# Altium PCB Double_side.PcbDoc
Units mm, origin at the board's own origin, x right, y up, seen from the top; angles counter-clockwise.
Board outline 123 x 94 mm, 2 copper layers (Top Layer, Bottom Layer); 63 components, 69 nets, 301 pads, 63 vias.
Unrouted connection lines stored in the file: 16.
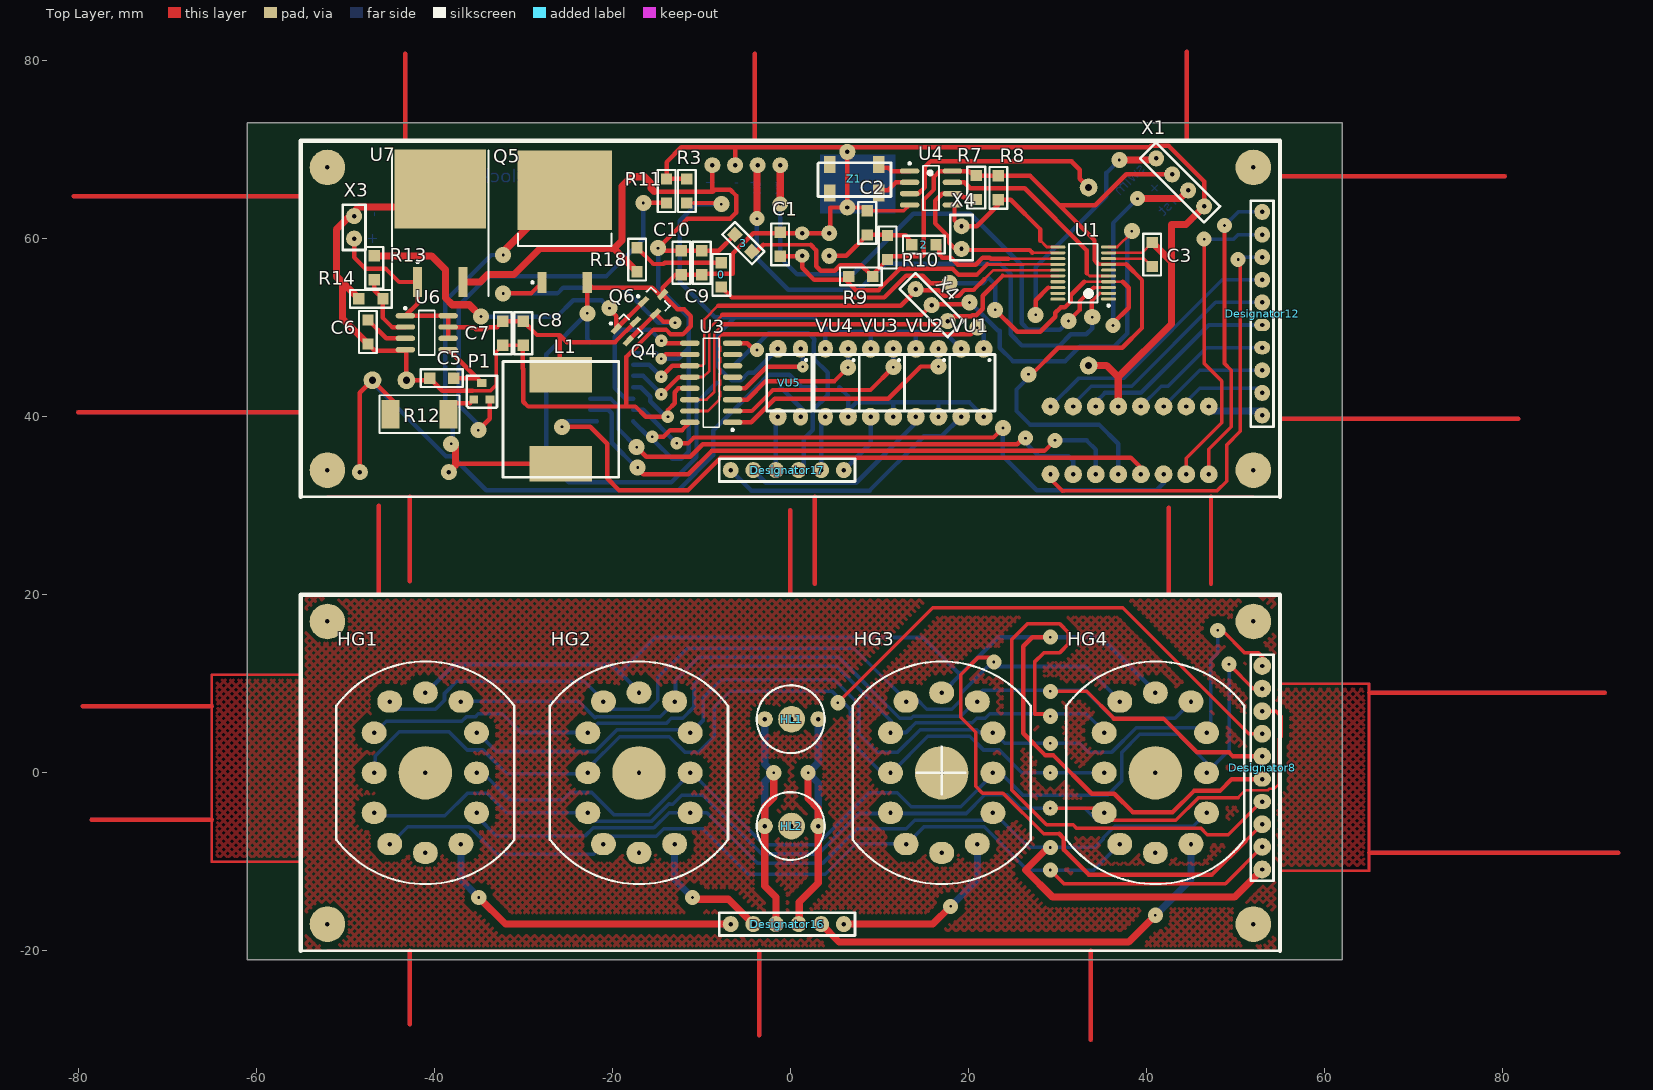
[diagram p0: Top Layer view]
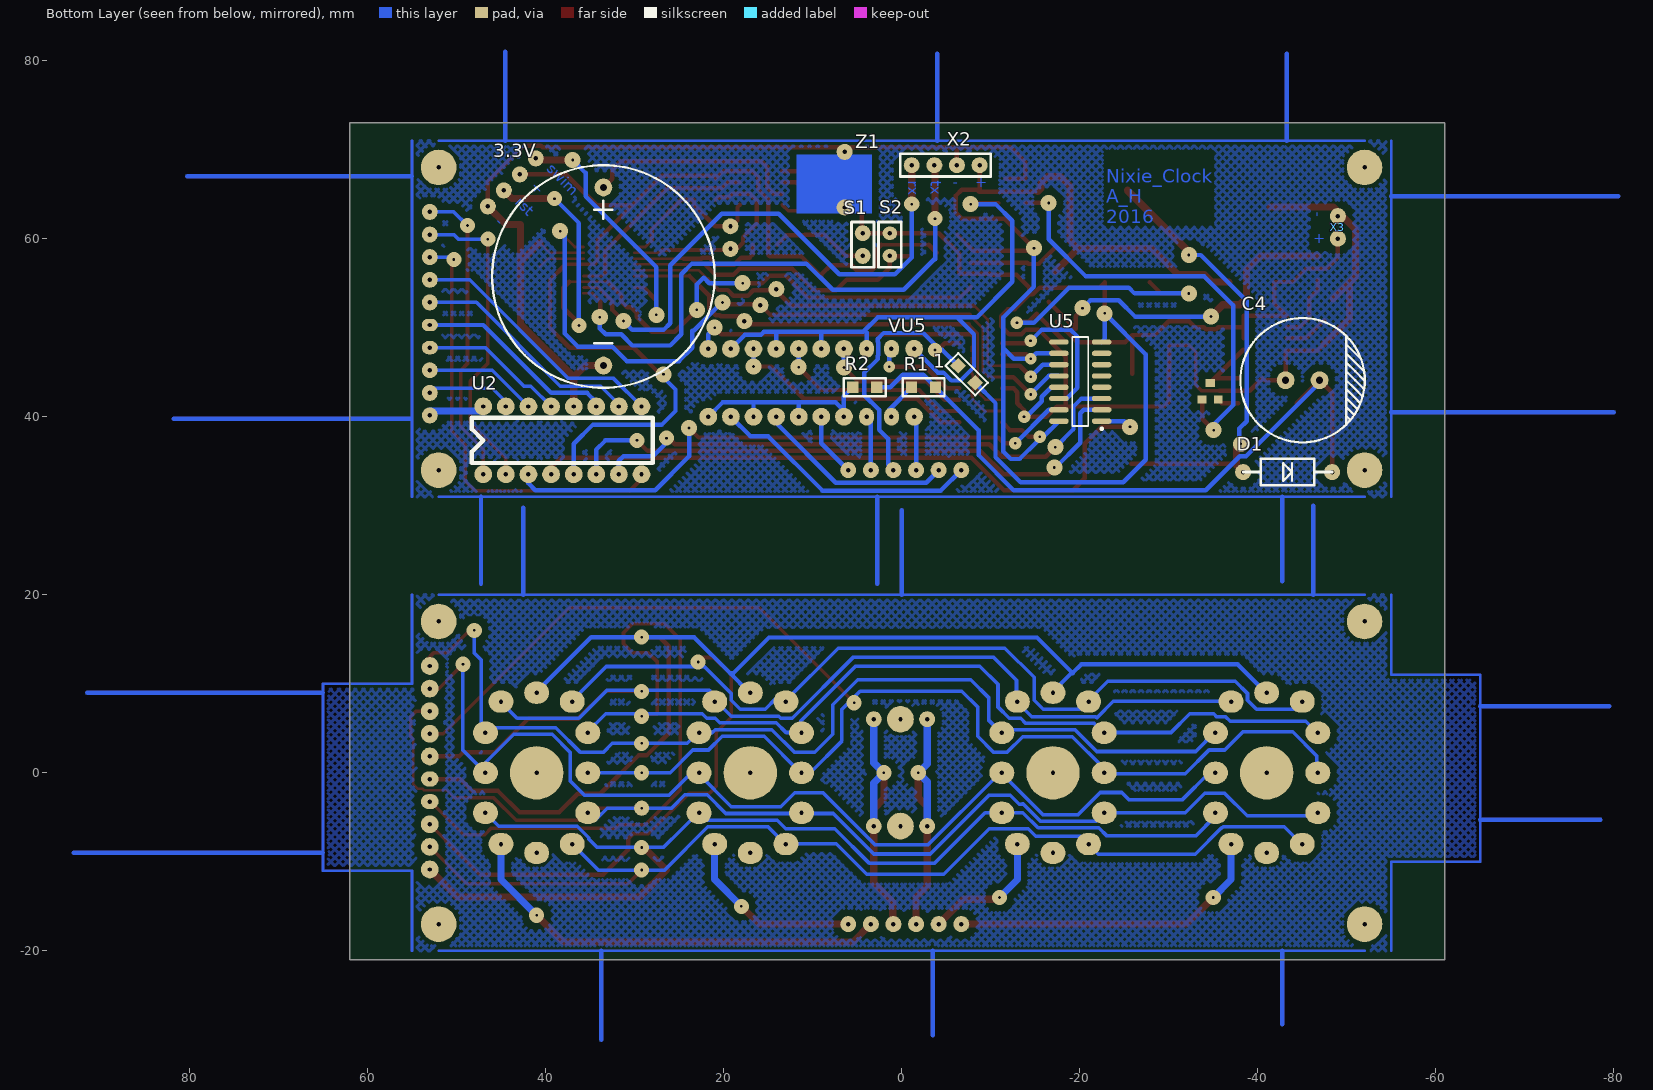
[diagram p1: Bottom Layer view, seen from below]
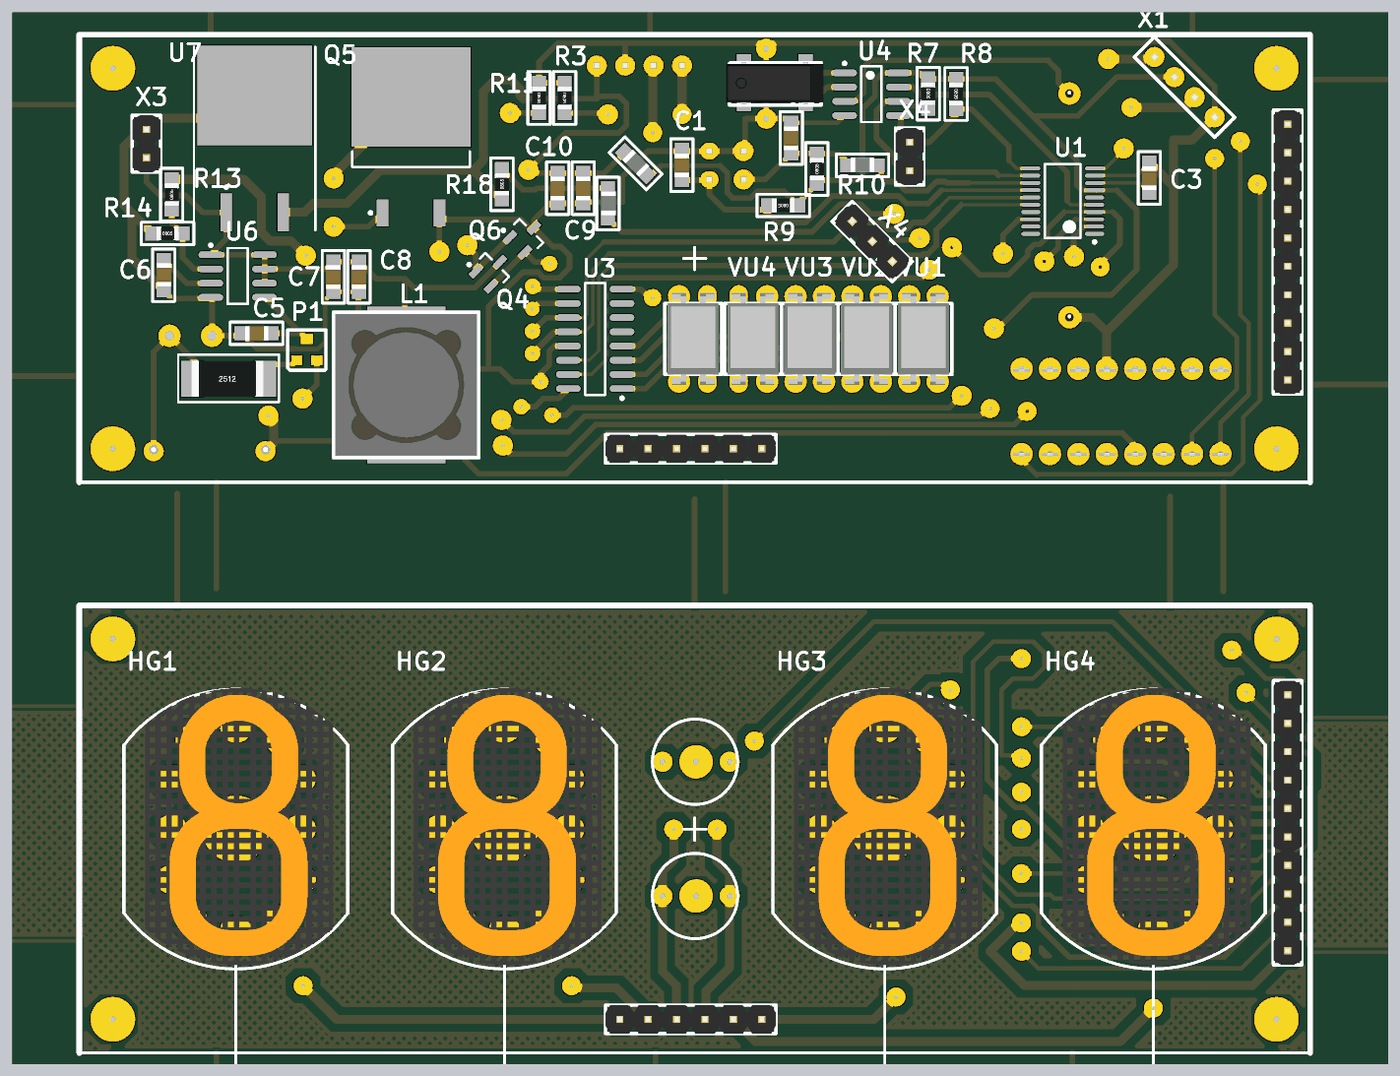
[diagram p2: 3D render of the assembled board from above, using the file's embedded part models]
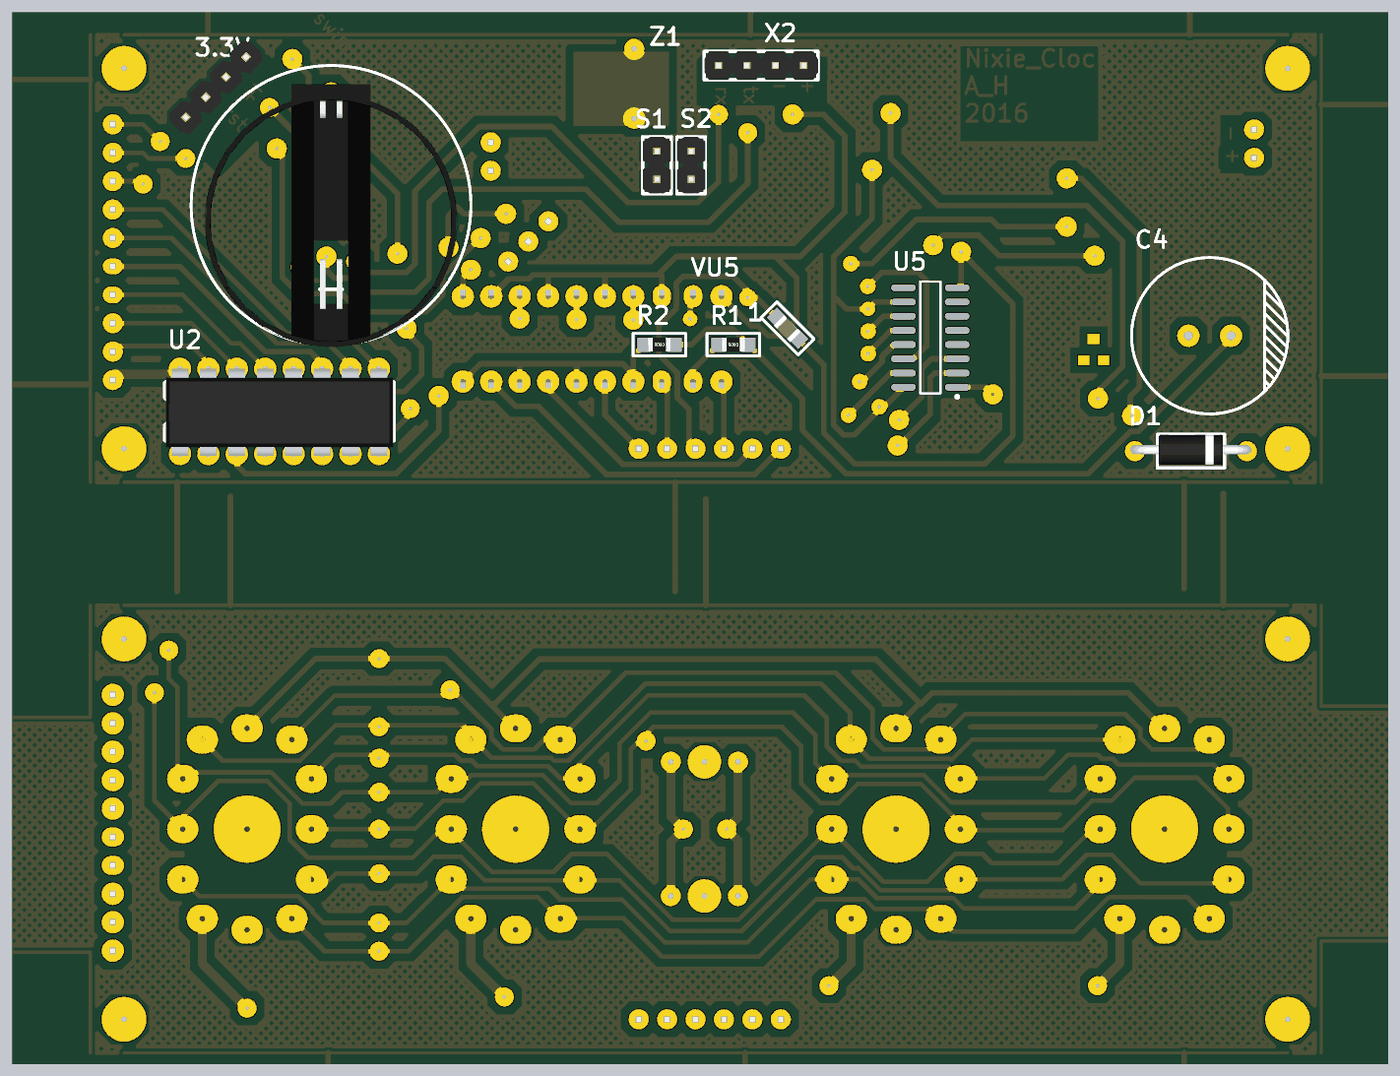
[diagram p3: 3D render of the assembled board from below, using the file's embedded part models]

## Layer stack, top to bottom
Top Solder: solder mask 0.0102, Solder Resist, Dk 3.5
Top Layer: signal copper 0.0356
Dielectric 1: dielectric 0.32, FR-4, Dk 4.8
Bottom Layer: signal copper 0.0356
Bottom Solder: solder mask 0.0102, Solder Resist, Dk 3.5

## Board outline
-61,-21 -61,73 62,73 62,-21

## Design rules (kind name [scope] priority, off if disabled: settings)
Clearance Poly_clearence [InPolygon vs InNetClass('All Nets')] p1: gap=0.7
Clearance Clearance_1 [All] p2: gap=0.254
Height [All] p1: minheight=0 maxheight=50 prefheight=12.7
PolygonConnect [All] p1: connectstyle=Relief reliefconductorwidth=0.254 reliefentries=4 polygonreliefangle="90 Angle" airgapwidth=0.254
RoutingVias [All] p1: holewidth=0.711 width=1.27 viastyle="Through Hole" minholewidth=0.711 minwidth=1.27 maxholewidth=0.711 maxwidth=1.27
SolderMaskExpansion [All] p1: expansion=0.102
Width [All] p1: maxlimit=5 minlimit=0.254 preferedwidth=0.5
29 further rules are at their usual default settings.

## Classes and differential pairs
net class Q[1..8]: Q1 Q2 Q3 Q4 Q5 Q6 Q7 Q8
component class Scheme: L1 X1 X2 X3 X4

## Components (designator, comment, footprint, x,y, rotation, side; value= is the part's Value field where it differs from the comment)
0 "Comment" R0805_pofigistor -7.747,57.277 r270 top
1 "Comment" R0805_pofigistor -8.255,43.815 r45 bottom
2 "Comment" R0805_pofigistor 13.65,59.325 r0 top
3 "Comment" R0805_pofigistor -6.227,60.456 r315 top
3.3V "CR2032_Holder_BH-642" BH-642(CR2032) 33.5,45.75 r180 bottom
C1 "1u" C0805 -1.143,60.706 r270 top
C2 "1u" C0805 8.636,63.119 r270 top
C3 "1u" C0805 40.64,59.563 r270 top
C4 "Cond_4700uF" Cond_3*1.27 -46.94,44.1 r0 bottom
C5 "100" C0805 -40.513,44.323 r0 top
C6 "470" C0805 -47.448,48.164 r90 top
C7 "Condensator_0805" C0805 -32.289,50.723 r270 top
C8 "Condensator_0805" C0805 -30.003,50.723 r270 top
C9 "Condensator_0805" C0805 -9.956,58.643 r270 top
C10 "Condensator_0805" C0805 -12.242,58.643 r270 top
D1 "HER106" DO-41 -38.354,33.782 r180 bottom
Designator8 "Comment" "Pins 10x2.54"#1 53,12 r270 top
Designator12 "Comment" "Pins 10x2.54"#2 53,63 r270 top
Designator16 "Comment" "Pins 6x2.54" 6,-17 r180 top
Designator17 "Comment" "Pins 6x2.54" 6,34 r180 top
HG1 "ИН-12" ИН-12 -41,0 r0 top
HG2 "ИН-12" ИН-12 -17,0 r0 top
HG3 "ИН-12" ИН-12 17,0 r0 top
HG4 "ИН-12" ИН-12 41,0 r0 top
HL1 "ИНС-1" INS-1 -1.87,6.022 r0 top
HL2 "ИНС-1" INS-1 -1.87,-5.978 r0 top
L1 "220uH" SRR1208 -25.781,44.704 r270 top
P1 "PVZ3A222 2.2k" PVZ3A222 -35.56,41.91 r0 top
Q4 "BC817-16" SOT23_N -18.138,49.936 r45 top
Q5 "IRF840AS" D2PAK_N -25.35,61.88 r90 top
Q6 "BC807-16" SOT23_N -15.085,52.99 r45 top
R1 "1020" R0805 -3.81,43.307 r0 bottom
R2 "Resistor" R0805 2.794,43.307 r0 bottom
R3 "470" R0805 -11.622,66.706 r270 top
R7 "10k" R0805 20.878,67.087 r270 top
R8 "10k" R0805 23.368,67.056 r270 top
R9 "10k" R0805 9.271,55.753 r180 top
R10 "10k" R0805 10.922,57.658 r90 top
R11 "3k" R0805 -13.908,66.706 r270 top
R12 "560k" R2512 -41.656,40.259 r0 top
R13 "330" R0805 -46.736,55.372 r90 top
R14 "330" R0805 -48.464,53.244 r0 top
R18 "10k" R0805 -17.222,56.292 r90 top
S1 "Tact_switch" "Pins 2x2.54"#1 4.368,60.61 r270 bottom
S2 "Tact_switch" "Pins 2x2.54"#2 1.32,60.61 r270 bottom
U1 "STM8S003" STM8S003_TSOP20 32.893,56.134 r180 top
U2 "К155ИД1" К155ИД1 47,33.528 r90 bottom
U3 "SN74HC595D" D016_N -8.89,43.815 r180 top
U4 "DS1307Z+T&R" S8+2_N 15.798,65.69 r0 top
U5 "SN74HC595D" D016_N -20.066,43.942 r0 bottom
U6 "MC34063AD" 751-05_N -40.844,49.434 r0 top
U7 "L7805ABD2T" TO-263 -39.32,60.356 r0 top
VU1 "Optopara_TLP627" Optopara_TLP627#1 21.72,47.62 r270 top
VU2 "Optopara_TLP627" Optopara_TLP627#1 16.64,47.62 r270 top
VU3 "Optopara_TLP627" Optopara_TLP627#1 11.56,47.62 r270 top
VU4 "Optopara_TLP627" Optopara_TLP627#2 6.48,47.62 r270 top
VU5 "Optopara_TLP627" Optopara_TLP627#3 1.143,47.625 r270 top
X1 "Pins 4x2.54" "Pins 4x2.54" 46.482,63.627 r135 top
X2 "Pins 4x2.54" "Pins 4x2.54" -8.75,68.25 r0 bottom
X3 "Pins 2x2.54" "Pins 2x2.54"#1 -49,60 r90 bottom
X4 "I2C debug" "Pins 2x2.54"#1 19.225,58.85 r90 top
X4 "SPI debug" "Pins 3x2.54" 14.075,54.325 r315 top
Z1 "Crystal Oscillator" "Geyer KX - 327S 32.768kHz" 9.906,68.326 r180 top

## Footprints (in the part's own frame and the unit in brackets; to place one, negate y for a bottom-side part, rotate by r counter-clockwise, add the part's x,y. Pads: shape width x height; smd on the part's side, far side on the other; paste and mask are expansions set on the pad)
751-05_N [mm] "SOIC, 8-Leads, Body 4.9x3.9mm, Pitch 1.27mm, IPC Medium Density"
  oval 2.2x0.6 smd: 1(-2.4,1.905) 2(-2.4,0.635) 3(-2.4,-0.635) 4(-2.4,-1.905) 5(2.4,-1.905) 6(2.4,-0.635) 7(2.4,0.635) 8(2.4,1.905)
  silkscreen extent -2.52,-2.5 0.9,2.88, body extent -1.95,-2.45 1.95,2.45, height 1.75
BH-642(CR2032) [mm]
  round 2 hole 0.762: 1(0,0) 2(0,20)
  silkscreen extent -12.5,-2.5 12.5,22.5, body extent -11.3,-2.67 11.3,20.83, height 8.2
C0805 [mm]
  rect 1.27x1.27 smd: 1(0,0) 2(2.7,0)
  silkscreen extent -1,-1 3.7,1, body extent 0.32,-0.66 2.42,0.64, height 0.51
Cond_3*1.27 [mm]
  round 2 hole 0.8: 1(0,0) 2(3.81,0)
  silkscreen extent -5.08,-6.98 8.89,6.98
D2PAK_N [mm] "D2-PAK, 4-Leads, Body 8.8x10.4mm, Pitch 2.54mm, Lead Span 15.1mm, IPC Medium Density"
  rect 2.4x1.05 smd: 1(-6.8,2.54) 3(-6.8,-2.54)
  rect 8.9x10.65 smd: 2(3.55,0)
  silkscreen extent -6.92,-5.25 -1.3,5.25, body extent -2.7,-5.28 6.3,5.28, height 4.69
D016_N [mm] "SOIC, 16-Leads, Body 9.9x3.9mm, Pitch 1.27mm, IPC Medium Density"
  oval 2.2x0.6 smd: 1(-2.4,4.445) 2(-2.4,3.175) 3(-2.4,1.905) 4(-2.4,0.635) 5(-2.4,-0.635) 6(-2.4,-1.905) 7(-2.4,-3.175) 8(-2.4,-4.445) 9(2.4,-4.445) 10(2.4,-3.175) 11(2.4,-1.905) 12(2.4,-0.635) 13(2.4,0.635) 14(2.4,1.905) 15(2.4,3.175) 16(2.4,4.445)
  silkscreen extent -2.53,-5 0.9,5.42, body extent -1.95,-4.95 1.95,4.95, height 1.75
DO-41 [mm]
  round 1.8 hole 0.5: 1(0,0) 2(10,0)
  silkscreen extent 0,-1.5 10,1.5, body extent -0.43,-1.23 10.43,1.5, height 3.36
"Geyer KX - 327S 32.768kHz" [mm]
  rect 1.3x1.9 smd: 1(0,0) 2(0,3.2) 3(5.5,3.2) 4(5.5,0)
  silkscreen extent -1.4,-0.2 6.8,3.6, body extent -1.6,-0.25 7.1,3.55, height 2.51
INS-1 [mm]
  round 1.8 hole 0.5: 1(-1,0) 2(5,0)
  round 3 hole 0.5: 3(2,0)
  silkscreen extent -1.9,-3.81 5.71,3.81, body extent -1.59,-3.5 5.41,3.5, height 28
Optopara_TLP627#1 [mm]
  round 2 hole 0.5: 1(0,0) 2(0,-2.54) 3(7.62,-2.54) 4(7.62,0)
  silkscreen extent 0.63,-3.81 6.98,1.27, body extent -0.59,-3.56 8.21,1.02, height 4.46
Optopara_TLP627#2 [mm]
  round 2 hole 0.5: 1(0,0) 4(7.62,0)
  oval 2x1.65 hole 0.5: 2(0,-2.54) 3(7.62,-2.54)
  silkscreen extent 0.63,-3.81 6.98,1.27, body extent -0.59,-3.56 8.21,1.02, height 4.46
Optopara_TLP627#3 [mm]
  oval 2x1.65 hole 0.5: 1(0,0) 4(7.62,0)
  round 2 hole 0.5: 2(0,-2.54) 3(7.62,-2.54)
  silkscreen extent 0.63,-3.81 6.98,1.27, body extent -0.59,-3.56 8.21,1.02, height 4.46
"Pins 2x2.54"#1 [mm]
  round 1.8 hole 0.5: 1(0,0) 2(2.54,0)
  silkscreen extent -1.27,-1.27 3.81,1.27, body extent -1.27,-1.27 3.81,1.27, height 8.81
"Pins 2x2.54"#2 [mm]
  oval 1.5x1.65 hole 0.5: 1(0,0) 2(2.54,0)
  silkscreen extent -1.27,-1.27 3.81,1.27, body extent -1.27,-1.27 3.81,1.27, height 8.81
"Pins 3x2.54" [mm]
  round 1.8 hole 0.5: 1(0,0) 2(2.54,0) 3(5.08,0)
  silkscreen extent -1.27,-1.27 6.35,1.27, body extent -1.27,-1.27 6.35,1.27, height 8.81
"Pins 4x2.54" [mm]
  round 1.8 hole 0.5: 1(0,0) 2(2.54,0) 3(5.08,0) 4(7.62,0)
  silkscreen extent -1.27,-1.27 8.89,1.27, body extent -1.27,-1.27 8.89,1.27, height 8.81
"Pins 6x2.54" [mm]
  round 1.8 hole 0.5: 1(0,0) 2(2.54,0) 3(5.08,0) 4(7.62,0) 5(10.16,0) 6(12.7,0)
  silkscreen extent -1.27,-1.27 13.97,1.27, body extent -1.27,-1.27 13.97,1.27, height 8.81
"Pins 10x2.54"#1 [mm]
  round 2 hole 0.5: 1(0,0) 2(2.54,0) 3(5.08,0) 4(7.62,0) 5(10.16,0) 8(17.78,0) 9(20.32,0) 10(22.86,0)
  oval 1.7x2 hole 0.5: 6(12.7,0) 7(15.24,0)
  silkscreen extent -1.27,-1.27 24.13,1.27, body extent -1.42,-1.6 24.28,1.6, height 8.81
"Pins 10x2.54"#2 [mm]
  round 1.8 hole 0.5: 1(0,0) 2(2.54,0) 3(5.08,0) 4(7.62,0) 5(10.16,0) 8(17.78,0) 9(20.32,0) 10(22.86,0)
  oval 1.4x1.8 hole 0.5: 6(12.7,0)
  oval 1.5x1.8 hole 0.5: 7(15.24,0)
  silkscreen extent -1.27,-1.27 24.13,1.27, body extent -1.42,-1.42 24.28,1.42, height 8.81
PVZ3A222 [mm]
  rect 1x0.9 all layers, no hole: 1(0,0) 3(1.8,0)
  rect 1.1x0.9 all layers, no hole: 2(0.9,1.9)
  silkscreen extent -0.8,-0.9 2.6,2.7
R0805 [mm]
  rect 1.27x1.27 smd: 1(0,0) 2(2.7,0)
  silkscreen extent -1,-1 3.7,1, body extent 0.35,-0.62 2.35,0.63, height 0.61
R0805_pofigistor [mm]
  rect 1.27x1.27 smd: 1(0,0) 2(2.7,0)
  silkscreen extent -1,-1 3.7,1, body extent 0.3,-0.61 2.4,0.69, height 0.51
R2512 [mm]
  rect 2x3.2 smd: 1(-3.25,0) 2(3.25,0)
  silkscreen extent -4.5,-2.1 4.5,2.15, body extent -3.3,-1.6 3.1,1.6
S8+2_N [mm] "SOIC, 8-Leads, Body 4.9x3.9mm, Pitch 1.27mm, IPC Medium Density"
  oval 2.2x0.6 smd: 1(-2.4,1.905) 2(-2.4,0.635) 3(-2.4,-0.635) 4(-2.4,-1.905) 5(2.4,-1.905) 6(2.4,-0.635) 7(2.4,0.635) 8(2.4,1.905)
  silkscreen extent -2.52,-2.5 0.9,2.88, body extent -2,-2.5 2,2.5, height 1.75
SOT23_N [mm] "SOT23, 3-Leads, Body 2.9x1.3mm, Pitch 0.95mm, Lead Span 2.3mm, IPC Medium Density"
  rect 1.3x0.6 smd: 1(-1.05,0.95) 2(-1.05,-0.95) 3(1.05,0)
  silkscreen extent -1.17,-1.5 0.7,1.92, body extent -0.7,-1.5 0.7,1.5, height 1.1
SRR1208 [mm]
  rect 4x7 smd: 1(0,0) 2(10,0)
  silkscreen extent -1.5,-6.5 11.5,6.5, body extent -1.35,-6.35 11.35,6.35, height 8.5
STM8S003_TSOP20 [mm]
  oval 1.7x0.35 smd: 1(-2.85,2.925) 2(-2.85,2.275) 3(-2.85,1.625) 4(-2.85,0.975) 5(-2.85,0.325) 6(-2.85,-0.325) 7(-2.85,-0.975) 8(-2.85,-1.625) 9(-2.85,-2.275) 10(-2.85,-2.925) 11(2.85,-2.925) 12(2.85,-2.275) 13(2.85,-1.625) 14(2.85,-0.975) 15(2.85,-0.325) 16(2.85,0.325) 17(2.85,0.975) 18(2.85,1.625) 19(2.85,2.275) 20(2.85,2.925)
  silkscreen extent -2.98,-3.3 1.6,3.77, body extent -2.25,-3.3 2.25,3.3, height 1.2
TO-263 [mm] "D2-PAK/TO-263-AB; 3 Leads (1 Cropped); Body 15.9 (inc. leads) x 10.4 mm (LxW max)"
  rect 1x3.4 smd: 1(-2.54,-5.225) 3(2.54,-5.225)
  rect 10.25x8.9 smd: 4(0,5.225)
  silkscreen extent -5.43,-6.83 5.43,9.57
ИН-12 [mm]
  round 6 hole 0.5: 0(0,0)
  oval 2.8x2.5 hole 0.5 unplated: 1(4,-8) 2(5.75,-4.5) 3(5.75,0) 4(5.75,4.5) 5(4,8) 6(0,9) 7(-4,8) 8(-5.75,4.5) 9(-5.75,0) 10(-5.75,-4.5) 11(-4,-8) 12(0,-9)
  silkscreen extent -10.01,-12.5 10.01,12.51, body extent -10,-13.5 10,13.5, height 25
К155ИД1 [mm]
  round 2 hole 0.5: 1(0,0) 2(0,-2.54) 3(0,-5.08) 4(0,-7.62) 5(0,-10.16) 6(0,-12.7) 7(0,-15.24) 8(0,-17.78) 9(7.62,-17.78) 10(7.62,-15.24) 11(7.62,-12.7) 12(7.62,-10.16) 13(7.62,-7.62) 14(7.62,-5.08) 15(7.62,-2.54) 16(7.62,0)
  silkscreen extent 1.27,-19.05 6.35,1.27, body extent -0.18,-19.05 7.62,1.27, height 5.01

## Part data
C1 C2 C3 C5 C6: library part Condensator_0805
D1: library part Diod
L1: library part Inductance
P1: library part Podstroechnik
Q4: "NPN General-purpose Transistor"
Q5: "HEXFET Power MOSFET"
Q6: "PNP General-purpose Transistor"
R1 R3 R7 R8 R9 R10 R11 R12 R13 R14 R18: library part Resistor
U3 U5: "8-Bit Shift Register with 3-State Output Registers"
U4: "64 x 8, Serial, I2C Real-Time Clock, 5.0V, 8-Pin SO, 0 to 70 degC, Pb-Free, Reel"
U6: "DC-to-DC Converter Control Circuit"
U7: "Precision 1A Regulator"
X4: library part "Pins 2x2.54"
X4: library part "Pins 3x2.54"

## Free pads (board coordinates)
  round 1.8 hole 0.5: 2(6.405,63.5) 3(6.405,69.75)
  round 4 hole 0.5: 4(-52,17) 5(-52,-17) 6(52,17) 7(52,-17) 8(-52,34) 9(52,68) 10(52,34) 11(-52,68)
  round 1.7 hole 0.3: 12(29.2,-3.975)

## Via types
v1: diameter 1.8, hole 0.3, Top Layer to Bottom Layer, 27 vias
v2: diameter 1.7, hole 0.3, Top Layer to Bottom Layer, 26 vias
v3: diameter 1.4, hole 0.3, Top Layer to Bottom Layer, 7 vias
v4: diameter 1.3, hole 0.3, Top Layer to Bottom Layer, 1 vias
v5: diameter 1.55, hole 0.3, Top Layer to Bottom Layer, 1 vias
v6: diameter 1.27, hole 0.3, Top Layer to Bottom Layer, 1 vias

## Nets (pads, with @x,y where several pads share a name; then routed paths per layer and width w, separated by ;. In a path a pad name is that pad's centre, name@x,y a point inside that pad or via, vN(x,y) a via of type N, cw(c..) or ccw(c..) an arc to the next point about the centre after c; other vN are vias at no path point)
GND: 1.1 1.2 3.3V.1 C1.1 C2.1 C3.1 C4.2 C5.1 C6.1 C7.2 C8.2 C9.2 C10.2 Designator16.3 Designator17.3 HL1.2 HL2.2 pad.2 pad.3 Q5.3 Q6.3 R3.1 R11.1 R14.1 S1.1 S2.1 U1.9 U2.12 U3.8 U3.13 U4.4 U5.8 U5.13 U6.4 U7.4 X1.1 X2.2 X3.2 | length 385.3
  Top Layer w0.3: U1.9 39.486,58.409 C3.1
  Top Layer w0.4: -35.687,42.926 -35.418,42.926 -35.398,42.906 -33.675,42.906 -33.02,43.561 -33.02,47.292 C7.2 C8.2 -30.003,46.941 ; C2.1 12.733,63.119 U4.4
  Top Layer w0.5: C6.1 -46.699,47.415 -43.13,47.415 C4.2 C5.1@-40.736,44.1 ; C5.1 -39.116,42.926 -35.687,42.926 ; C8.2@-30.048,47.422 -30.048,45.415 -30.012,45.379 -30.012,41.696 -29.464,41.148 -17.398,41.148 -16.25,40 v3(-13.75,40) -13.75,40.75 -13,41.5 -13,42.75 -12.57,43.18 U3.13 ; v1(-22.81,51.612) Q5.3 -22.213,54.483 -15.494,54.483 -14.743,53.732 Q6.3 ; -18.415,41.148 -18.415,46.736 -15.367,49.784 -13.97,49.784 -13.462,49.276 -12.065,49.276 -11.176,50.165 -11.176,51.308 -11.938,52.07 -12.68,52.07 Q6.3 ; R3.1 R11.1 -13.908,68.592 -12.249,70.251 -0.996,70.251 4.003,70.248 ; C9.2 C10.2 -12.904,55.943 -14.342,54.505 Q6.3 ; C9.2@-9.956,56.038 -6.46,56.038 -6.46,58.324 -4.174,60.61 S2.1 S1.1 4.5,60.478 4.5,60.61 4.5,63.5 pad.2 ; U3.8 -4.826,48.26 -4.066,47.5 v5(-3.75,47.5) ; X2.2 -6.21,70.211 ; 4.14,70.25 40.343,70.25 40.512,70.419 42.484,70.419 46.482,66.421 X1.1 ; pad.3 pad.2 ; C2.1@8.255,63.5 pad.2
  Top Layer w0.8: -50.292,55.072 -50.292,51.008 C6.1 ; R14.1 -51,55.78 -51,61.014 -48.474,63.54 U7.4@-41.36,63.54 ; Designator16.3 1,-16.92 1,-14.5 3.13,-12.37 HL2.2 3.13,-4.03 2,-2.9 v2(2,0) ; 3.3V.1 35.53,45.75 36.83,44.45 ; U2.12@36.83,41.275 36.83,44.45 ; C3.1 42.799,57.404 ; X1.1 44.45,61.595 42.799,61.595 42.799,57.404 ; 36.83,44.45 42.799,50.419 42.799,57.404
  Bottom Layer w0.5: U5.8 -22.81,48.731 v1(-22.81,51.612) -27.432,46.99 -27.432,35.179 -24.892,32.639 -13.361,32.639 -10.541,35.459 -10.541,41.529 1.1 ; U5.13 -16.807,43.307 -15.754,42.254 -15.754,42.184 -15.75,42.18 -15.75,41.75 -14,40 v3(-13.75,40) ; 1.2 -4.57,47.5 v5(-3.75,47.5) -3.75,48.066 -2.413,49.403 2.032,49.403 2.667,48.768 2.667,48.401 2.611,48.345 2.611,46.895 2.667,46.839 2.667,46.482 4.191,44.958 4.191,42.418 2.54,40.767 2.54,38.54 1.5,37.5 1.5,34.58 Designator17.3
  Bottom Layer w0.8: HL2.2 3.13,-1.13 v2(2,0) 3.13,1.13 HL1.2
Net3.3V_2: 3.3V.2 U4.3 | length 24.8
  Top Layer w0.5: U4.3 14.382,65.055 15.113,65.786 15.113,68.072 15.748,68.707 31.623,68.707 31.623,68.641 32.512,67.752 32.512,66.738 3.3V.2
NetC1_2: C1.2 R9.2 S2.2 U1.14 | length 35.3
  Top Layer w0.3: 22.098,57.105 26.205,57.105 26.217,57.117 30.035,57.117 U1.14
  Top Layer w0.5: C1.2 S2.2@1.257,58.006 ; S2.2 1.32,56.719 2.667,55.372 6.19,55.372 7.333,54.229 9.906,54.229 12.277,56.6 18.236,56.6 18.911,55.925 20.918,55.925 22.098,57.105
NetC2_2: 2.1 2.2 C2.2 R10.2 S1.2 U1.13 | length 26.2
  Top Layer w0.3: 24.486,57.755 30.039,57.755 U1.13
  Top Layer w0.5: S1.2 6.287,58.07 C2.2 R10.2@10.861,60.419 ; R10.2 12.942,60.358 2.1@14,59.3 ; 2.2@16.7,59.3 16.7,58.25 17.079,57.871 18.031,57.871 18.827,57.075 20.825,57.075 21.621,57.871 22.398,57.871 22.51,57.759 24.486,57.759
NetC3_2: C3.2 U1.8 | length 5.3
  Top Layer w0.3: U1.8 39.744,57.759 C3.2
NetC5_2: C5.2 P1.2 U6.5 | length 8
  Top Layer w0.5: U6.5 -38.379,47.529 -35.173,44.323 ; C5.2 -35.173,44.323 ; P1.2 -35.173,44.323
NetC6_2: C6.2 U6.3 | length 5.1
  Top Layer w0.5: C6.2 -45.383,48.799 U6.3
NetC7_1: C7.1 C8.1 L1.1 Q4.3 U6.1 U6.6 U6.7 U6.8 U7.1 X3.1 | length 49.9
  Top Layer w0.5: X3.1 -49,57.89 -47.752,56.642 -45.466,56.642 -43.955,55.131 U7.1 -41.86,52.723 U6.1 U6.8 U6.7 ; U6.6 U6.7 ; L1.1@-25.902,44.825 -25.902,49.18 ; Q4.3@-17.393,50.679 Q4.3 -19.687,48.387 -25.109,48.387 -25.902,49.18 ; U6.7 -35.554,50.069 -35.331,49.846 -34.168,49.846 -33.946,50.069 -32.943,50.069 C7.1 C8.1 -28.459,49.18 -25.902,49.18
NetD1_1: D1.1 L1.2 Q5.2 | length 51
  Top Layer w0.5: D1.1 -37.617,34.519 -37.432,34.704 L1.2 ; v1(-32.258,58.166) v1@-32.258,58.521
  Top Layer w0.8: v1(-38.1,36.957) -38.024,36.957 -37.681,36.614 -37.617,36.678 -37.617,34.519 ; v1@-32.258,58.521 Q5.2
  Bottom Layer w0.5: v1(-38.1,36.957) -37.928,37.129 -37.928,38.673 -38.75,39.496 -38.75,53 -33.584,58.166 v1(-32.258,58.166)
NetHG1_1: Designator16.6 Designator17.6 HG1.1 VU1.3 | length 66.6
  Top Layer w0.8: v2(-35,-14) -32,-17 Designator16.6
  Bottom Layer w0.5: Designator17.6 -4.4,31.7 8.9,31.7 15,37.8 16.98,37.8 VU1.3
  Bottom Layer w0.8: HG1.1 -37,-12 v2(-35,-14)
NetHG1_2: Designator8.10 Designator12.10 HG1.2 HG2.2 HG3.2 HG4.2 U2.16 | length 130.1
  Top Layer w0.8: v2@28.956,-8.382 26.416,-10.922 29.464,-13.97 49.89,-13.97 Designator8.10
  Bottom Layer w0.4: HG1.2@-35.148,-4.475 -35.148,-4.961 -33.02,-7.089 -23.066,-7.089 -22.155,-6.179 -21.215,-6.179 -15.323,-6.179 -13.619,-4.475 -9.368,-4.475 -3.708,-10.135 3.658,-10.135 7.496,-6.296 13.008,-6.296 13.97,-5.334 21.992,-5.334 HG3.2@22.526,-4.801 ; HG3.2@22.852,-4.475 24.702,-6.325 26.759,-8.382 v2(29.21,-8.382) 34.205,-8.382 35.146,-7.441 35.146,-7.294 36.44,-6 45.25,-6 HG4.2
  Bottom Layer w0.8: U2.16@47.48,40.648 Designator12.10@53,40.648
NetHG1_3: Designator8.2 Designator12.2 HG1.3 HG2.3 HG3.3 HG4.3 U2.2 | length 157
  Top Layer w0.4: U2.2@44.46,33 44.46,35.316 48.454,39.31 48.454,44.002 46.482,45.974 v2(46.482,59.944) ; v2@49.276,11.684 v2(49.276,12.192) 52.008,9.46 Designator8.2
  Bottom Layer w0.4: HG1.3@-35.148,0.025 -34.569,0.025 -31.496,-3.048 -25.575,-3.048 -24.737,-2.21 -22.301,-2.21 -19.812,-4.699 -15.875,-4.699 -11.25,-0.074 HG2.3 ; HG2.3@-11.186,0.064 HG2.3@-11.148,0.025 ; HG2.3@-10.566,0.025 -10.566,-0.483 -2.946,-8.103 2.946,-8.103 8.824,-2.225 12.004,-2.225 13.589,-3.81 19.126,-3.81 22.852,-0.085 22.852,0.025 23.602,0.025 26.167,-2.54 35.588,-2.54 37.211,-0.917 37.211,2.286 39.243,4.318 43.561,4.318 HG4.3@47.315,0.564 ; v2(46.482,59.944) 49.784,59.944 50.3,60.46 Designator12.2 ; HG4.3 49.276,2.526 v2(49.276,12.192)
NetHG1_4: Designator8.1 Designator12.1 HG1.4 HG2.4 HG3.4 HG4.4 U2.1 | length 149.9
  Top Layer w0.4: U2.1@47,33 47,36.332 49.53,38.862 49.53,45.212 48.768,45.974 v2(48.768,61.468) ; v2(48,16) 48.516,16 51.054,13.462 52.578,13.462 Designator8.1@53.34,12.7
  Bottom Layer w0.4: HG1.4@-35.148,4.525 -33.02,2.397 -21.911,2.397 -19.482,4.826 -10.848,4.826 -9.804,5.869 -9.804,8.407 -7.772,10.439 4.928,10.439 7.722,7.645 7.722,4.343 9.754,2.311 12.04,2.311 14.58,4.851 20.93,4.851 21.256,4.525 22.852,4.525 24.075,3.302 v2(29.21,3.302) 32.512,3.302 33.528,2.286 36.068,2.286 38.862,5.08 46.195,5.08 46.75,4.525 HG4.4@46.775,4.525 ; HG4.4 HG4.4@46.775,4.525 ; v2@48.008,16 v2(48,16) 48,13.456 47.244,12.7 47.244,4.994 HG4.4@46.775,4.525 ; v2(48.768,61.468) 50.3,63 Designator12.1
NetHG1_5: Designator8.5 Designator12.5 HG1.5 HG2.5 HG3.5 HG4.5 U2.10 | length 147
  Top Layer w0.4: v2(29.21,9.144) 33.296,9.144 36.344,6.096
  Top Layer w0.5: 36.344,6.096 41.91,6.096 45.72,2.286 49.276,2.286 49.722,1.84 Designator8.5
  Bottom Layer w0.4: HG1.5@-36.898,8.025 -32.998,8.025 -23.782,8.025 -21.961,6.204 -21.895,6.204 -21.803,6.296 -14.628,6.296 -12.898,8.025 -12.898,10.393 -10.292,13 5.415,13 12.294,6.121 13.564,6.121 13.814,6.371 19.148,6.371 20.802,8.025 21.61,9.295 29.21,9.295 33.071,9.295 36.245,6.121 43.198,6.121 HG4.5@45.102,8.025 ; U2.10@31.76,40.62 31.76,41.412 33.782,43.434 38.354,43.434 47.76,52.84 Designator12.5
NetHG1_6: Designator8.6 Designator12.6 HG1.6 HG2.6 HG3.6 HG4.6 U2.11 | length 166.2
  Top Layer w0.5: v2(29.21,15.24) 27.178,15.24 26.162,14.224 26.162,4.435 28.649,1.948 29.548,1.948 33.85,-2.354 36.39,-2.354 38.481,-4.445 42.926,-4.445 45.339,-2.032 48.26,-2.032 49.592,-0.7 Designator8.6
  Bottom Layer w0.5: HG1.6@-40.898,9.025 -37.732,12.192 -20.193,12.192 -19.202,11.201 ; HG2.6@-16.898,9.025 -19.074,11.201 -19.202,11.201 ; HG3.6@17.102,9.025 19.278,11.201 ; U2.11@34.3,40.62 34.3,41.636 35.336,42.672 39.37,42.672 46.998,50.3 Designator12.6 ; HG4.6@41.102,9.025 34.887,15.24 v2(29.21,15.24) 23.316,15.24 19.278,11.201 ; -19.202,11.201 -15.204,15.2 14.899,15.2 18.898,11.201 19.278,11.201
NetHG1_7: Designator8.8 Designator12.8 HG1.7 HG2.7 HG3.7 HG4.7 U2.14 | length 165.6
  Top Layer w0.4: v2@22.352,12.954 21.082,12.954 19.146,11.018 19.146,6.254 20.828,4.572 20.828,-1.524 21.59,-2.286 23.876,-2.286 28.448,-6.858 30.192,-6.858 ; 51.16,-7.62 Designator8.8
  Top Layer w0.5: 30.192,-6.858 30.734,-7.4 30.734,-8.636 33.528,-11.43 47.35,-11.43 51.16,-7.62
  Bottom Layer w0.4: HG1.7@-44.898,8.025 -44.01,7.137 -39.864,7.137 -38.848,8.153 -38.848,8.915 -37.471,10.293 -23.166,10.293 HG2.7@-20.898,8.025 ; HG2.7@-20.01,7.137 -15.9,7.137 -14.884,8.153 -14.884,10.716 -11.6,14 7.127,14 13.102,8.025 13.484,8.407 14.061,8.407 15.331,7.137 18.136,7.137 19.152,8.153 19.152,8.915 22.174,11.938 33.189,11.938 37.063,8.064 HG4.7@37.102,8.025 ; U2.14@41.92,40.62 42.164,40.864 42.164,41.402 45.982,45.22 Designator12.8
  other v2: 22.86,12.446
NetHG1_8: Designator8.7 Designator12.7 HG1.8 HG2.8 HG3.8 HG4.8 U2.13 | length 179
  Top Layer w0.4: v2@28.956,6.604 27.432,6.604 27.432,12.446 28.448,13.462 30.226,13.462 31.242,14.478 31.242,15.748 30.226,16.764 26.67,16.764 24.892,14.986 24.892,-1.967 28.775,-5.85 31.758,-5.85 32.112,-6.204 46.082,-6.204 46.844,-6.966 49.168,-6.966 Designator8.7@52.947,-3.187
  Bottom Layer w0.4: HG1.8@-46.648,4.525 -45.398,5.775 -36.898,5.775 -36.398,6.275 -35.398,6.275 -35.044,6.629 -32.362,6.629 -30.258,4.525 HG2.8@-22.648,4.525 ; HG2.8@-21.814,5.359 -21.586,5.588 -13.894,5.588 -13.36,6.121 -12.09,6.121 -10.82,7.391 -10.82,9.931 -8.788,11.963 5.182,11.963 11.352,5.793 11.352,4.525 12.984,4.525 14.072,5.613 20.422,5.613 20.945,6.137 21.903,6.137 22.396,6.629 33.248,6.629 HG4.8@35.352,4.525 ; U2.13@39.38,40.62 39.38,41.158 41.656,43.434 42.418,43.434 46.744,47.76 Designator12.7
  other v2: 29.21,6.35
NetHG1_9: Designator8.4 Designator12.4 HG1.9 HG2.9 HG3.9 HG4.9 U2.9 | length 191.4
  Top Layer w0.4: v2(5.334,7.874) 16.002,18.542 37.338,18.542 51.5,4.38 Designator8.4
  Bottom Layer w0.4: HG1.9@-46.648,0.025 -46.648,1.877 -43.928,4.597 -38.34,4.597 -36.308,2.565 -34.53,2.565 -31.872,-0.093 HG2.9@-22.843,-0.093 ; HG2.9@-22.648,0.135 -22.648,0.593 -19.177,4.064 -13.589,4.064 -11.836,2.311 -10.312,2.311 -8.534,4.089 -8.534,7.391 -6.756,9.169 4.674,9.169 6.706,7.137 6.706,3.581 10.262,0.025 11.352,0.025 15.416,4.089 20.168,4.089 21.692,2.565 23.47,2.565 26.01,0.025 v2@29.21,0.025 ; v2(29.21,0) HG4.9 ; U2.9@29.22,40.62 29.22,41.158 32.358,44.296 37.438,44.296 48.522,55.38 Designator12.4
NetHG1_10: Designator8.3 Designator12.3 HG1.10 HG2.10 HG3.10 HG4.10 pad.12 U2.8 | length 178
  Top Layer w0.3: 50.29,-2.796 51.132,-1.954 53.669,-1.954 53.845,-1.778 54.356,-1.778 54.864,-1.27 54.864,3.81 55.118,4.064
  Top Layer w0.4: pad.12 HG4.10@34.725,-3.975 ; U2.8@29.22,33 30.616,31.604 30.716,31.704 47.96,31.704 49.022,32.766 49.022,36.83 50.546,38.354 50.546,57.15 v2@50.8,57.404 ; HG4.10 36.084,-5.334 43.307,-5.334 45.845,-2.796 50.29,-2.796 ; Designator8.3 54.548,6.92 55.118,6.35 55.118,4.064
  Bottom Layer w0.4: HG1.10@-46.648,-4.475 -46.297,-4.826 -38.81,-4.826 -36.27,-2.286 -34.036,-2.286 -31.847,-4.475 HG2.10@-22.648,-4.475 ; HG2.10 -21.789,-5.461 -15.621,-5.461 -13.691,-3.531 ; -13.546,-3.472 -13.632,-3.472 -13.691,-3.531 ; HG4.10@34.416,-5.334 33.057,-3.975 pad.12 25.852,-3.975 24.352,-2.475 21.852,-2.475 19.754,-4.572 7.696,-4.572 3.15,-9.119 -3.2,-9.119 -9.804,-2.515 -12.192,-2.515 -13.208,-3.531 -13.691,-3.531 ; v2(50.292,57.658) 50.554,57.92 Designator12.3
NetHG1_11: Designator8.9 Designator12.9 HG1.11 HG2.11 HG3.11 HG4.11 U2.15 | length 129.3
  Top Layer w0.4: v2(29.21,-10.922) 30.734,-12.446 48.874,-12.446 Designator8.9
  Bottom Layer w0.4: HG1.11@-44.898,-7.975 -42.994,-6.071 -36.112,-6.071 -36.004,-6.179 -35.934,-6.179 -32.968,-9.144 -22.068,-9.144 HG2.11@-20.962,-8.038 ; HG2.11 -20.112,-7.112 -15.065,-7.112 -14.224,-6.271 -9.858,-6.271 -4.724,-11.405 3.912,-11.405 7.342,-7.975 13.102,-7.975 15.006,-6.071 21.761,-6.071 26.612,-10.922 v2(29.21,-10.922) 34.078,-10.922 HG4.11 ; U2.15@44.46,40.62 44.46,41.666 45.974,43.18 52.5,43.18 Designator12.9
NetHG2_1: Designator16.5 Designator17.5 HG2.1 VU2.3 | length 37.2
  Top Layer w0.8: v2(-11,-14) -10.8,-14.2 -6.96,-14.2 Designator16.5
  Bottom Layer w0.5: Designator17.5 -2.756,32.596 7.396,32.596 14.1,39.3 VU2.3
  Bottom Layer w0.8: HG2.1 -13,-12 v2(-11,-14)
NetHG3_1: Designator16.1 Designator17.1 HG3.1 VU3.3 | length 28.3
  Top Layer w0.8: Designator16.1 16,-17 v2(18,-15)
  Bottom Layer w0.5: Designator17.1 9.02,37.02 VU3.3
  Bottom Layer w0.8: v2(18,-15) 21,-12 HG3.1
NetHG4_1: Designator16.2 Designator17.2 HG4.1 VU4.3 | length 55.5
  Top Layer w0.8: Designator16.2 5.46,-19 38,-19 v2(41,-16)
  Bottom Layer w0.5: Designator17.2 3.46,39.52 VU4.3
  Bottom Layer w0.8: v2(41,-16) 45,-12 HG4.1
NetHL1_1: Designator16.4 Designator17.4 HL1.1 HL2.1 VU5.3 | length 37.3
  Top Layer w0.5: Designator16.4@-1.87,-16.75 Designator16.4
  Top Layer w0.8: v2(-1.87,0) -1.87,-2.77 -2.87,-3.77 HL2.1 -2.87,-12.73 -1.62,-13.98 Designator16.4
  Bottom Layer w0.5: Designator17.4 -1.62,39.52 VU5.3@-1.14,40
  Bottom Layer w0.8: HL2.1 -2.87,-1 v2(-1.87,0) -2.87,1 HL1.1
NetP1_1: P1.1 R12.2 | length 2.4
  Top Layer w0.5: R12.2@-37.813,41.529 -35.941,41.529 P1.1
NetP1_3: P1.3 R11.2 | length 49.3
  Top Layer w0.5: v1(-35.052,38.481) -33.76,39.773 P1.3 ; v1(-16.51,64.008) -13.91,64.008 R11.2
  Bottom Layer w0.5: v1(-35.052,38.481) -35.052,39.116 -37.25,41.314 -37.25,52.5 -33.997,55.753 -20.701,55.753 -16.51,59.944 v1@-16.51,63.881
NetQ1_1: 
NetQ1_2: 
NetQ2_1: 
NetQ2_2: 
NetQ3_1: 
NetQ3_2: 
NetQ4_1: Q4.1 Q6.1 R13.2 | length 38.9
  Top Layer w0.5: v1@-20.193,51.943 -19.552,51.302 Q4.1 Q6.1
  Top Layer w0.8: R13.2 -40.292,58.072 -38.735,56.515 -38.735,53.34 -37.973,52.578 -36.068,52.578 -34.75,51.26 v1(-34.75,51.25)
  Bottom Layer w0.5: v1(-34.75,51.25) -26.22,51.25 -24.384,53.086 -21.209,53.086 v1(-20.32,52.197)
NetQ4_2: Q4.2 Q5.1 Q6.2 | length 32.7
  Top Layer w0.5: v1(-32.258,53.848) -29.121,53.848 Q5.1 ; Q4.2 Q6.2 -14.253,50.673 v3@-13.208,50.673
  Bottom Layer w0.5: v1(-32.258,53.848) -26.162,53.848 -25.527,54.483 -18.796,54.483 -14.859,50.546 v3(-12.954,50.546)
NetR1_2: R1.2 VU5.4 | length 4.3
  Bottom Layer w0.5: R1.2 1.4,40.797 VU5.4@1.4,40
NetR2_2: R2.2 VU1.4 VU2.4 VU3.4 VU4.4 | length 23.1
  Bottom Layer w0.5: R2.2 6.48,42.321 VU4.4@6.48,40.68 ; VU4.4 VU4.4@6.48,40.68 ; VU3.4 11.56,41.54 ; VU2.4 16.64,41.56 ; VU1.4 20.12,41.6 7.4,41.6 VU4.4@6.48,40.68
NetR3_2: R3.2 VU1.2 VU2.2 VU3.2 VU4.2 VU5.2 | length 70.7
  Top Layer w0.5: -10.872,64.006 v1@-7.872,64.006
  Bottom Layer w0.5: v1(-7.747,63.881) -10.541,63.881 -12.421,62.001 -12.421,55.143 -8.458,51.181 -6.223,51.181 ; VU5.2 -4.064,44.958 -4.699,44.958 -5.588,44.069 -6.604,44.069 -8.128,45.593 -8.128,49.276 -6.223,51.181 ; VU4.2 3.94,49.46 ; VU3.2 9.02,49.48 ; VU2.2 14.1,49.4 ; VU1.2 17.6,49.2 15.8,49.2 15.47,49.53 4.318,49.53 2.667,51.181 -6.223,51.181
NetR4_2: 
NetR5_2: 
NetR6_2: 
NetR7_2: R7.2 U1.12 U4.6 X4.1@19.225,58.85 | length 23.3
  Top Layer w0.3: 27.189,58.409 28.39,58.409 28.394,58.405 28.936,58.405 28.94,58.409 U1.12
  Top Layer w0.5: R7.2 20.622,64.643 19.431,64.643 19.019,65.055 U4.6 17.049,65.055 16.256,64.262 16.256,61.719 17.821,60.154 17.821,59.554 18.65,58.725 26.873,58.725 27.189,58.409
NetR8_2: R8.2 U1.11 U4.5 X4.2@19.225,61.39 | length 18.2
  Top Layer w0.3: 28.092,59.766 28.8,59.059 U1.11
  Top Layer w0.5: U4.5 18.435,63.548 18.435,62.04 19.075,61.4 20.95,61.4 23.368,63.818 R8.2 24.769,64.356 28.092,61.033 28.092,59.766
NetR13_1: R13.1 R14.2 U6.2 | length 7.6
  Top Layer w0.5: R13.1 -46.736,54.216 R14.2 -45.764,51.098 -44.735,50.069 U6.2
NetR18_2: 0.1 0.2 R18.2 U1.4 X1.2 | length 93.1
  Top Layer w0.3: 33.01,55.159 33.014,55.163 35.739,55.163 U1.4 37.341,55.159
  Top Layer w0.5: R18.2 -15.38,57.15 -14.224,57.15 -14.097,57.277 0.1 ; 0.2 -6.561,53.391 10.541,53.391 12.996,55.846 14.879,55.846 15.725,55 v1(17.85,55) ; v1(23,52) 23,52.546 22.727,52.273 25.47,49.53 28.067,49.53 29.769,51.232 29.769,51.664 30.378,52.273 30.836,52.273 31.496,52.934 31.496,53.645 33.01,55.159 ; v2@36.25,50.5 38,52.25 38,54.5 37.341,55.159
  Top Layer w0.8: v2(39,64.5) 43.763,64.5 X1.2
  Bottom Layer w0.5: v1(17.85,55) 21.599,55 22.225,55.626 23,54.851 v1(23,52) ; v2(36.25,50.25) 36.25,61.75 v2(39,64.5)
NetU1_2: U1.2 X2.3 | length 64.7
  Top Layer w0.3: 34.767,53.859 U1.2
  Top Layer w0.4: 33.867,52.959 34.767,53.859
  Top Layer w0.5: 33.867,52.959 33.867,51.223 v1(33.909,51.181)
  Top Layer w0.8: v2(-3.75,62.25) X2.3@-3.75,68.25
  Bottom Layer w0.5: -3.75,57.67 v2(-3.75,62.25) ; -3.67,57.67 -0.25,54.25 7.75,54.25 10.7,57.2 23.55,57.2 24.75,56 24.75,49.25 26,48 30.25,48 31.5,49.25 33.25,49.25 33.909,49.909 v1(33.909,51.181)
NetU1_3: U1.3 X2.4 | length 62.6
  Top Layer w0.3: 34.062,54.509 U1.3
  Top Layer w0.5: v1(31.25,50.75) 32.487,51.987 32.487,52.934 34.062,54.509
  Top Layer w0.8: v2(-1.13,63.88) X2.4
  Bottom Layer w0.5: v2(-1.13,63.88) -1.13,57.88 0.75,56 7,56 13.806,62.806 20.194,62.806 26,57 26,50.5 26.75,49.75 30.25,49.75 v1(31.25,50.75)
NetU1_5: U1.5 U4.7 | length 23.4
  Top Layer w0.3: 33.299,56.134 33.624,55.809 U1.5
  Top Layer w0.5: U4.7 19.527,66.325 20.193,65.659 26.316,65.659 33.299,58.676 33.299,56.134
NetU1_10: U1.10 U3.12 U5.12 X4.2@15.871,52.529 | length 84.6
  Top Layer w0.3: U3.12 -9.8,44.45 -9.102,45.148 -9.102,49.978 -7.645,51.435 ; U1.10 36.707,59.059 38.354,60.706 v1(38.354,60.833)
  Top Layer w0.5: v3(-14.5,42.5) -12.55,44.45 U3.12 ; -7.645,51.435 14.732,51.435 15.947,52.65 19.948,52.65 v1(20.126,52.828)
  Bottom Layer w0.5: U5.12 -16.511,44.577 -14.717,42.783 -15,42.5 v3(-14.5,42.5) ; v1(20.126,52.828) 20.126,52.578 20.154,52.55 20.309,52.705 23.359,49.656 23.5,49.656 23.5,47.75 25,46.25 30.883,46.25 32.512,47.879 36.379,47.879 37.846,49.346 37.846,60.325 v1(38.354,60.833)
NetU1_15: U1.15 U3.11 U5.11 X4.1@14.075,54.325 | length 56.9
  Top Layer w0.3: U3.11 -9.91,45.72 -9.656,45.974 -9.656,50.923 -8.103,52.476 ; 21.768,55.423 22.808,56.463 30.039,56.463 U1.15
  Top Layer w0.5: v3@-14.75,44.5 v3(-14.5,44.5) -13.28,45.72 U3.11 ; -8.103,52.476 12.401,52.476 14.133,54.208 16.656,54.208 17.268,53.596 18.909,53.596 19.544,54.232 20.577,54.232 21.768,55.423
  Bottom Layer w0.5: U5.11 -15.847,45.847 v3(-14.5,44.5)
NetU1_16: U1.16 U3.14 X4.3 | length 51.8
  Top Layer w0.3: U3.14 -9.419,41.91 -8.548,42.781 -8.548,49.364 -7.544,50.368 ; 23.83,55.809 U1.16
  Top Layer w0.5: -7.544,50.368 17.395,50.368 18.334,51.308 18.341,51.301 20.315,51.301 20.418,51.404 20.879,51.404 21.596,52.121 21.596,53.575 23.83,55.809
NetU1_18: U1.18 X1.4 | length 30.2
  Top Layer w0.3: 28.982,54.509 U1.18
  Top Layer w0.5: v1(27.559,51.435) 27.559,53.086 28.982,54.509 ; X1.4@40.913,68.834 X1.4
  Top Layer w0.8: v1(36.957,68.834) X1.4@40.913,68.834
  Bottom Layer w0.5: v1(27.559,51.435) 27.559,56.809 35.5,64.75 35.5,67.377 v1(36.957,68.834)
NetU2_3: U2.3 U5.15 | length 67.9
  Top Layer w0.5: v3(-12.75,37) -11.5,37 -10.834,37.666 22.807,37.666 v1(23.876,38.735)
  Bottom Layer w0.5: U5.15 -16.517,40.767 v3(-12.75,37) ; v1(23.876,38.735) 23.876,35.56 27.686,31.75 41.148,31.75 41.92,32.522 U2.3
NetU2_4: U2.4 U5.1 | length 77.7
  Top Layer w0.5: v1(-25.654,38.862) -22.479,38.862 -20.574,36.957 -20.574,33.074 -19.25,31.75 -11.5,31.75 -7.846,35.404 38.256,35.404 39.38,34.28 U2.4@39.38,33
  Bottom Layer w0.5: v1(-25.654,38.862) -25.019,39.497 U5.1 U5.1@-21.717,39.497
NetU2_6: U2.6 U5.2 | length 66.6
  Top Layer w0.5: v1@-17.276,34.29 -16.514,33.528 -11.472,33.528 -8.842,36.158 28.538,36.158 v2(29.718,37.338)
  Bottom Layer w0.5: U5.2 -20.447,40.767 -20.058,40.378 -20.058,37.072 -17.276,34.29 v1(-17.145,34.29) ; v2(29.718,37.338) 33.274,37.338 34.3,36.312 U2.6
NetU2_7: U2.7 U5.3 | length 62.3
  Top Layer w0.5: v1(-17.272,36.576) -16.196,35.5 -11.25,35.5 -9.838,36.912 25.482,36.912 v2@26.416,37.846
  Bottom Layer w0.5: U5.3 -20.193,42.037 -19.304,41.148 -19.304,38.608 v1(-17.272,36.576) ; v2(26.416,37.592) 26.416,37.084 27.94,35.56 31.242,35.56 31.76,35.042 U2.7
NetU3_9: U3.9 U5.14 | length 17.4
  Top Layer w0.5: v3@-14.224,48.26 U3.9
  Bottom Layer w0.5: U5.14 -18.537,42.037 -19.75,43.25 -19.75,49 -19,49.75 -15.714,49.75 v3(-14.478,48.514)
NetU3_12: 
NetU4_1: U4.1 Z1.1 | length 3.8
  Top Layer w0.5: Z1.1 10.256,67.976 10.972,67.976 11.353,67.595 U4.1
NetU4_2: U4.2 Z1.2 | length 4
  Top Layer w0.5: Z1.2 10.216,65.436 10.972,65.436 11.861,66.325 U4.2
Q1: U3.15 VU1.1 | length 43.4
  Top Layer w0.3: U3.15 -9.246,40.64 -7.994,41.892 -7.994,42.202 -7.874,42.322 -7.874,42.768 -7.994,42.888 -7.994,43.472 -7.874,43.592 -7.874,44.038 -7.994,44.158 -7.994,44.742 -7.874,44.862 -7.874,45.308 -7.994,45.428 -7.994,46.012 -7.874,46.132 -7.874,46.578 -7.994,46.698 -7.994,47.282 -7.874,47.402 -7.874,47.848 -7.994,47.968 -7.994,48.902 -7.62,49.276
  Top Layer w0.5: -7.62,49.276 20.276,49.276 v1(21,50)
  Bottom Layer w0.5: v1(21,50) 21.72,49.28 VU1.1
Q2: U3.1 VU2.1 | length 27.7
  Top Layer w0.5: U3.1 -4.38,39.37 -1.75,42 11,42 14.64,45.64 v1(16.64,45.64)
  Bottom Layer w0.5: v1(16.64,45.64) VU2.1
Q3: U3.2 VU3.1 | length 22.1
  Top Layer w0.5: U3.2 -4.318,40.64 -1.958,43 9,43 v1(11.56,45.56)
  Bottom Layer w0.5: v1(11.56,45.56) VU3.1
Q4: U3.3 VU4.1 | length 16.6
  Top Layer w0.5: U3.3 -4.84,41.91 -2.75,44 4.96,44 v1(6.48,45.52)
  Bottom Layer w0.5: v1(6.48,45.52) VU4.1
Q5: U3.4 VU5.1 | length 10.9
  Top Layer w0.5: U3.4 -5.08,43.18 -2.66,45.6 v4(1.4,45.6)
  Bottom Layer w0.5: v4(1.4,45.6) VU5.1@1.4,47.62
Q6: U3.5
Q7: U3.6
Q8: U3.7
VCC: 3.1 3.2 C9.1 C10.1 R7.1 R8.1 R9.1 R10.1 R18.1 U1.7 U2.5 U3.10 U3.16 U4.8 U5.10 U5.16 U7.3 X1.3 X2.1 | length 234.6
  Top Layer w0.4: -3.048,59.309 2.286,59.309 ; 34.537,57.109 37.735,57.109
  Top Layer w0.5: v3(-15.5,37.75) -14.25,37.75 -13.5,38.5 -12.16,38.5 U3.16 ; -15.278,65.278 -8.722,65.278 -8.5,65.5 -6.75,65.5 -6.096,64.846 -6.096,62.904 -6.77,62.23 -11.557,62.23 v1(-14.859,58.928) ; v1@-14.859,58.643 C10.1 C9.1 -8.04,58.643 3.1 ; v6(-14.5,46.5) -14.01,46.99 U3.10 ; -8.75,65.306 X2.1 ; 3.2@-3.937,58.42 -3.048,59.309 ; 2.286,59.309 2.921,58.674 2.921,56.896 3.41,56.407 4.972,56.407 5.588,57.023 7.977,57.023 9.017,55.983 9.017,55.753 R10.1 11.264,58 14.825,58 15.002,58.177 15.002,64.118 15,64.12 15,64.403 16.129,65.532 16.129,66.929 16.795,67.595 U4.8 20.035,67.595 R7.1@20.878,66.752 ; R7.1@20.909,67.056 R8.1 26.924,67.056 30.23,63.75 ; v1(26.75,44.75) 27.097,44.75 30.097,47.75 37.285,47.75 39.497,49.962 39.497,55.347 37.735,57.109 ; 34.537,57.18 34.163,57.554 34.163,59.817 30.23,63.75 ; X1.3 37.719,67.219 34.25,63.75 30.23,63.75
  Top Layer w0.8: U7.3 -34.836,55.131 -34.011,55.956 -31.039,55.956 -28.118,58.877 -19.807,58.877 ; R18.1 -19.807,58.877 ; -15.278,65.278 -15.634,65.634 -15.634,66.205 -16.383,66.954 -17.856,66.954 -18.898,65.913 -18.898,59.787 -19.807,58.877
  Bottom Layer w0.5: U5.16 -15.919,37.75 v3(-15.5,37.75) ; U5.10 -15.117,47.117 v6(-14.5,46.5) -12.605,46.5 -11.43,47.675 ; v3@-15.25,37.25 -13.25,35.25 -12.25,35.25 -11.43,36.07 -11.43,47.675 ; v1(-14.859,58.928) -14.859,54.61 -11.43,51.181 -11.43,47.675 ; v1(26.75,44.75) 26.75,44.403 25.4,43.053 25.4,40.64 26.924,39.116 34.671,39.116 36.84,36.947 U2.5
VCC1: C4.1 D1.2 R1.1 R2.1 R12.1 | length 77.1
  Top Layer w0.5: D1.2 -48.354,42.685 C4.1 R12.1@-44.369,41.529
  Bottom Layer w0.5: C4.1 -46.94,43.811 -38.682,35.553 -37.966,35.553 -34.163,31.75 -12.573,31.75 -8.636,35.687 -8.636,38.481 R1.1 -2.413,44.704 -0.127,44.704 1.27,43.307 R2.1
pads on no net: HG1.0 HG1.12 HG2.0 HG2.12 HG3.0 HG3.12 HG4.0 HG4.12 HL1.3 HL2.3 U1.1 U1.6 U1.17 U1.19 U1.20 U5.4 U5.5 U5.6 U5.7 U5.9 Z1.3 Z1.4
copper on no net: | length 1832.5
  Top Layer w0.3: -55,-20 -55,-10 -65,-10 -65,11 -55,11 -55,20 ; -55,31 -55,71 ; -52,-20 52,-20 ; -52,20 52,20 ; -52,31 52,31 ; -52,71 52,71 ; 55,-20 55,-11 65,-11 65,10 55,10 55,20 ; 55,31 55,71
  Top Layer w0.5: -80.5,64.75 -55,64.75 ; -80,40.5 -55,40.5 ; -79.5,7.5 -65,7.5 ; -78.5,-5.25 -65,-5.25 ; -46.25,20 -46.25,30 ; -43.25,71 -43.25,80.75 ; -42.75,-28.25 -42.75,-20 ; -42.75,21.5 -42.75,31 ; -4,71 -4,80.75 ; -3.5,-29.5 -3.5,-20 ; 0,20 0,29.5 ; 2.75,21.25 2.75,31 ; 33.75,-30 33.75,-20 ; 42.5,20 42.5,29.75 ; 44.5,71 44.5,81 ; 47.25,21.25 47.25,31 ; 55,67 80.25,67 ; 55.25,39.75 81.75,39.75 ; 65,-9 93,-9 ; 65,9 91.5,9
  Bottom Layer w0.3: -55,-20 -55,-10 -65,-10 -65,11 -55,11 -55,20 ; -55,31 -55,71 ; -52,-20 52,-20 ; -52,20 52,20 ; -52,31 52,31 ; -52,71 52,71 ; 55,-20 55,-11 65,-11 65,10 55,10 55,20 ; 55,31 55,71
  Bottom Layer w0.5: -80.5,64.75 -55,64.75 ; -80,40.5 -55,40.5 ; -79.5,7.5 -65,7.5 ; -78.5,-5.25 -65,-5.25 ; -46.25,20 -46.25,30 ; -43.25,71 -43.25,80.75 ; -42.75,-28.25 -42.75,-20 ; -42.75,21.5 -42.75,31 ; -4,71 -4,80.75 ; -3.5,-29.5 -3.5,-20 ; 0,20 0,29.5 ; 2.75,21.25 2.75,31 ; 33.75,-30 33.75,-20 ; 42.5,20 42.5,29.75 ; 44.5,71 44.5,81 ; 47.25,21.25 47.25,31 ; 55,67 80.25,67 ; 55.25,39.75 81.75,39.75 ; 65,-9 93,-9 ; 65,9 91.5,9

## Polygon pours and split planes (outlines as drawn)
no net on Top Layer "Top Layer-No Net" (hatched 45Degree grid 0.65 track 0.35, pour order 10): -55,20 54.7,20 55,19.7 55.1,19.6 55,9.85 64.85,9.85 64.85,-11 55,-11 55.1,-20.2 55.1,-20.1 55,-20 54.9,-19.9 -55,-19.9 -55,-9.95 -64.95,-9.95 -64.95,11 -55,11
no net on Bottom Layer "Top Layer-No Net" (hatched 45Degree grid 0.65 track 0.35, pour order 14): -55,71 55,71 55,31 -55,31
no net on Bottom Layer "Top Layer-No Net" (hatched 45Degree grid 0.65 track 0.35, pour order 12): -55,20 55,20 55,10 65,10 65,-11 55,-11 55,-20 -55,-20 -55,-10 -65,-10 -65,11 -55,11

## Other copper
Top Layer:
  pour cut-out: -41,-9 -44,-9 -46.75,-6.25 -46.75,4.5 -45.05,6.2 -45.05,8.275 -41.725,8.275 -41,9 -40,8 -37,8 -37,6.25 -35.25,4.5 -35.475,4.275 -35.475,-6.475 -37,-8
  pour cut-out: -21,-8 -22.75,-6.25 -22.75,4.5 -21,6.25 -21,8 -18,8 -17,9 -16,8 -13,8 -13,6.25 -11.25,4.5 -11.25,-6.25 -14,-9 -17,-9
  pour cut-out: 13.625,-9 11.25,-6.625 11.25,4.5 13,6.25 13,8 16,8 17,9 18,8 21,8 21,6.25 22.75,4.5 22.75,-6.25 20,-9
  pour cut-out: 38,-9 35.25,-6.25 35.25,4.5 37,6.25 37,8 39.75,8 40.8,9.05 41.85,8 45,8 45,6.25 46.75,4.5 46.75,-6.25 44,-9
Bottom Layer:
  rectangle net GND: 3.302,62.84 11.836,69.469
  pour cut-out: -48.95,63.95 -48.9,64 -45.8,64 -45.8,58.325 -45.925,58.45 -48.95,58.45
  pour cut-out: -11,64.5 0.9,64.5 1.025,64.625 1.025,69.225 -10.975,69.225 -11.05,69.15
  pour cut-out: 35.975,65.725 35.975,65.75 39.45,69.225 46.65,62.025 47.375,62.025 43.4,58.05 35.875,65.575 35.875,65.625
  pour cut-out: -27.325,39.775 -27.325,46.883 -27.432,46.99 -22.722,51.7 -20.65,51.7 -18.825,53.525 -15.125,49.825 -11.575,49.825 -11.575,35.8 -11.45,35.675 -13.525,33.6 -13.525,33.175 -15.95,33.175 -16.1,33.025 -17.025,33.95 -17.025,38.525
  pour cut-out: -41,-9 -44,-9 -46.75,-6.25 -46.75,4.5 -45.05,6.2 -45.05,8.275 -41.725,8.275 -41,9 -40,8 -37,8 -37,6.25 -35.25,4.5 -35.475,4.275 -35.475,-6.475 -37,-8
  pour cut-out: -21,-8 -22.75,-6.25 -22.75,4.5 -21,6.25 -21,8 -18,8 -17,9 -16,8 -13,8 -13,6.25 -11.25,4.5 -11.25,-6.25 -14,-9 -17,-9
  pour cut-out: 13.625,-9 11.25,-6.625 11.25,4.5 13,6.25 13,8 16,8 17,9 18,8 21,8 21,6.25 22.75,4.5 22.75,-6.25 20,-9
  pour cut-out: 38,-9 35.25,-6.25 35.25,4.5 37,6.25 37,8 39.75,8 40.8,9.05 41.85,8 45,8 45,6.25 46.75,4.5 46.75,-6.25 44,-9
  text "swim" at 40,67.75 h1.2 r45
  text "tx" at -3.25,66.5 h1.2 r90
  text "rx" at -0.75,66.5 h1.2 r90
  text "+" at -8.25,65.75 h1.2
  text "-" at -5.75,65.75 h1.2
  text "+" at 41.75,65.75 h1.2 r45
  text "rst" at 43.5,64 h1.2 r45
  text "-" at -46.25,63 h1.2 r90
  text "-" at 45.75,61.75 h1.2 r45
  text "Nixie_Clock / A_H / 2016" at -22.987,61.722 h1.52
  text "+" at -46.25,59.5 h1.2

## Silkscreen, mask and mechanical layers (free items; w line width, h text height)
Top Overlay:
  lines w0.3: -55,-20 4.987,-20 55,-20 ; -55,31 4.987,31 55,31 ; 16.993,-2.388 16.993,2.921 17,2.928 17,0 14.224,0 19.609,0
  lines w0.5: -55,-20 -55,20 55,20 55,-20 ; -55,31 -55,71 55,71 55,31

## Dimensions
-65,-10 to 65,-11 on Top Overlay
-41,0 to 41,0 on Top Overlay
-17,0 to 17,0 on Top Overlay